# Altium PCB PCB_USB-PD_Power.pcbdoc
Units mil, origin at the board's own origin, x right, y up, seen from the top; angles counter-clockwise.
Board outline 5605 x 4580 mil, 2 copper layers (Top Layer, Bottom Layer); 90 components, 34 nets, 233 pads, 105 vias.
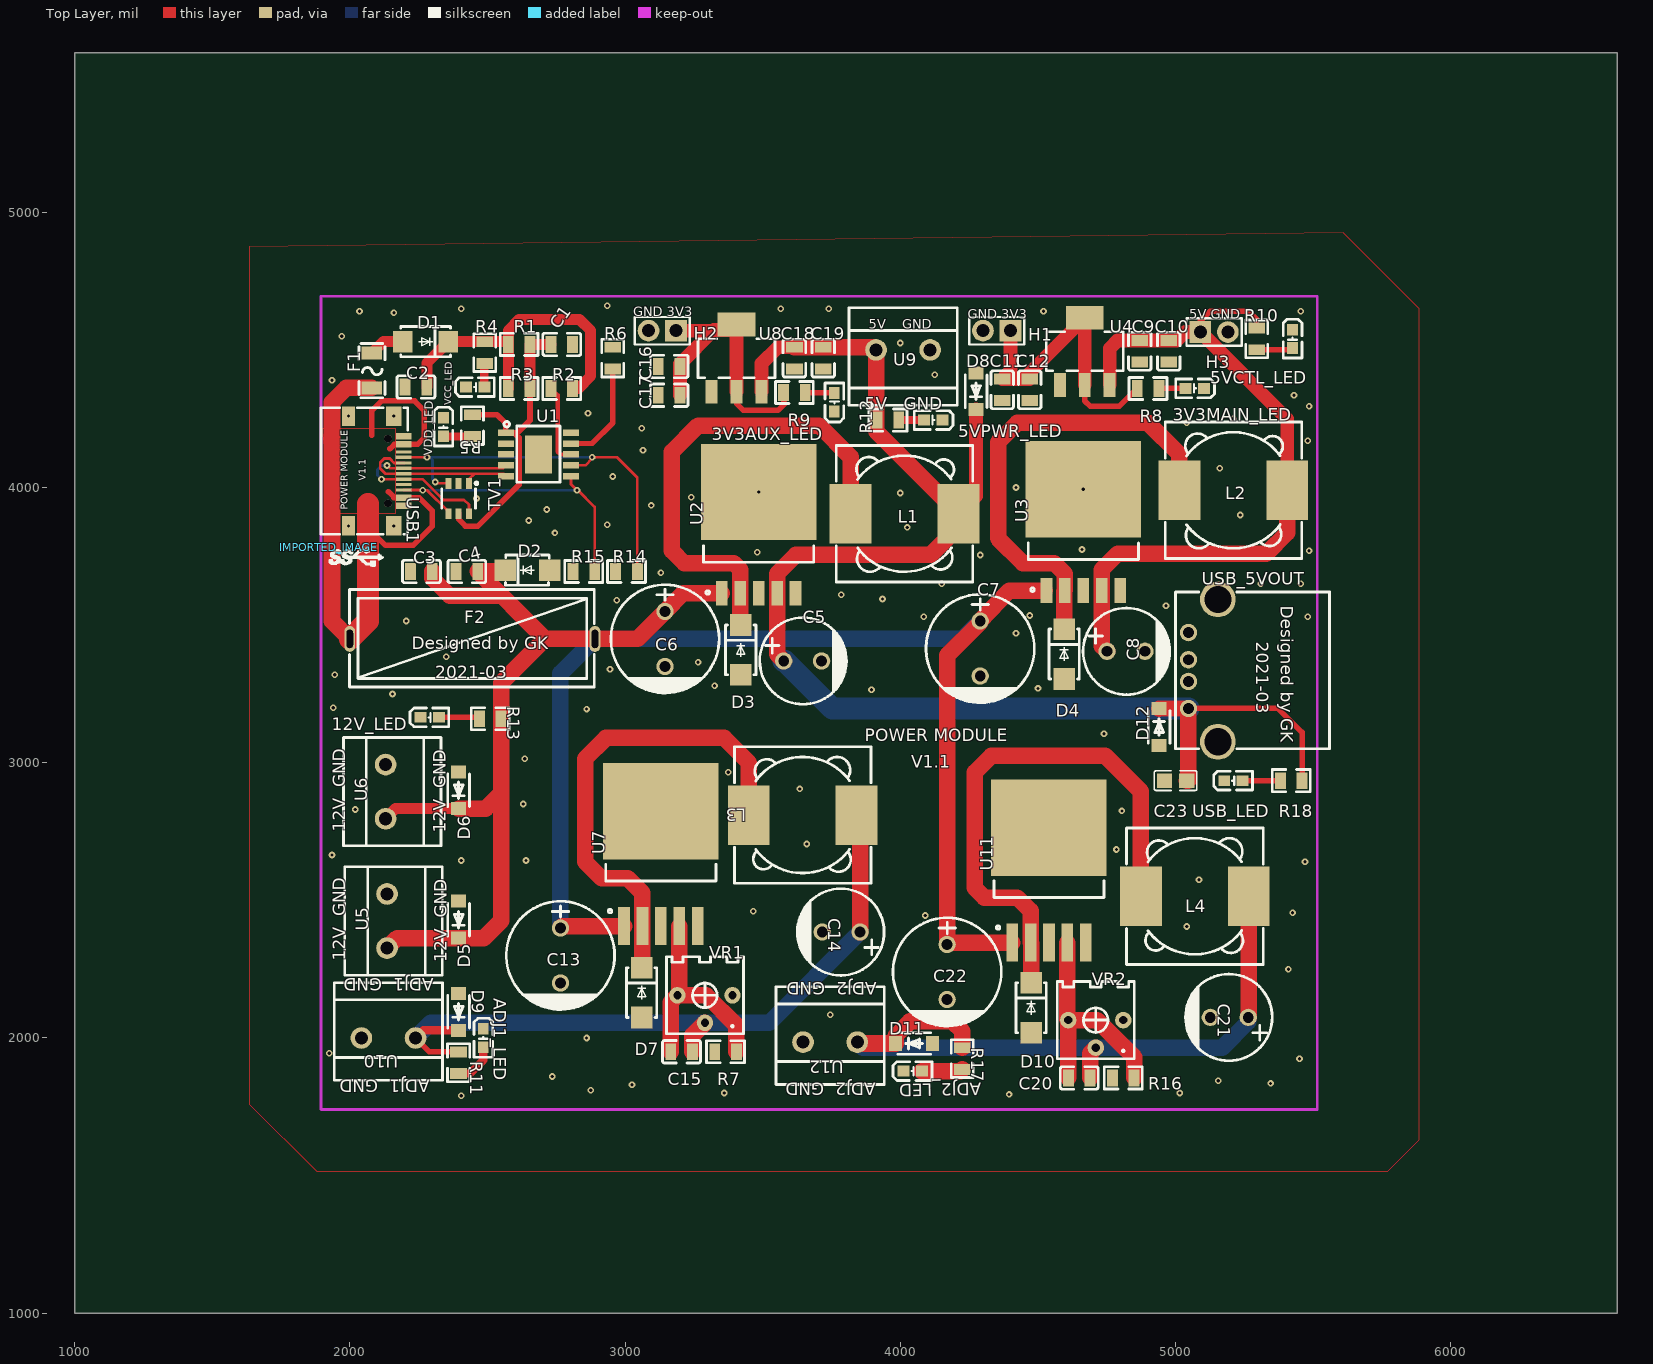
[diagram p0: Top Layer view]
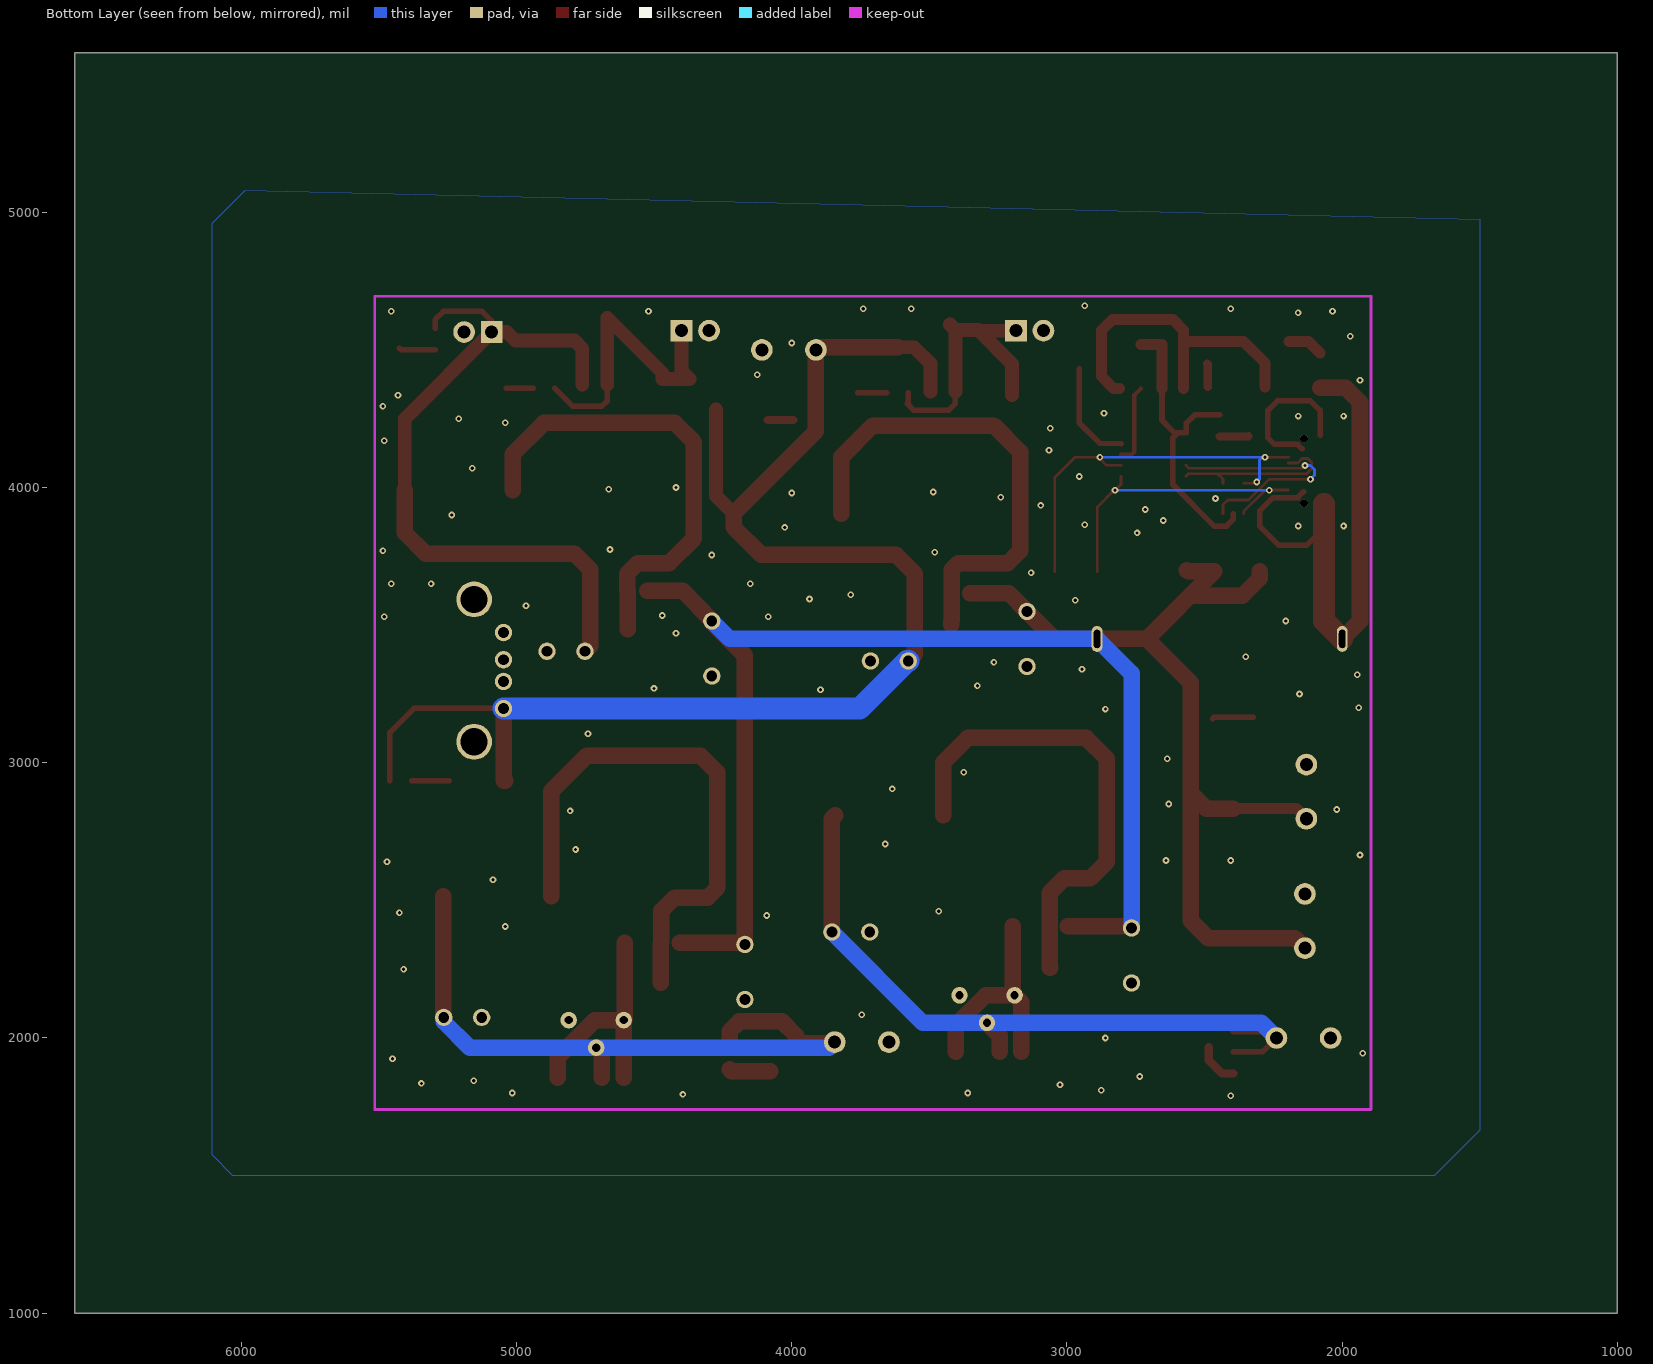
[diagram p1: Bottom Layer view, seen from below]

## Layer stack, top to bottom
Top Layer: signal copper (thickness not stored)
Dielectric: dielectric 12.6, FR-4, Dk 4.8
Bottom Layer: signal copper (thickness not stored)

## Board outline
6605,1000 1000,1000 1000,5580 6605,5580

## Components (designator, comment, footprint, x,y, rotation, side; value= is the part's Value field where it differs from the comment)
3V3AUX_LED "19-217/BHC-ZL1M2RY/3T" LED0603-R-RD 3760,4310 r90 top
3V3MAIN_LED "19-217/BHC-ZL1M2RY/3T" LED0603-R-RD 5070,4360 r180 top
5VCTL_LED "19-217/BHC-ZL1M2RY/3T" LED0603-R-RD 5425,4540 r270 top
5VPWR_LED "19-217/BHC-ZL1M2RY/3T" LED0603-R-RD 4120,4245 r180 top
12V_LED "19-217/BHC-ZL1M2RY/3T" LED0603-R-RD 2290,3165 r0 top
ADJ1_LED "19-217/BHC-ZL1M2RY/3T" LED0603-R-RD 2485,2000 r270 top
ADJ2_LED "19-217/BHC-ZL1M2RY/3T" LED0603-R-RD 4045,1880 r0 top
C1 "1uF" C0805#1 2770,4520 r0 top
C2 "10uF" C0805#1 2240,4365 r0 top
C3 "10uF" C0805#1 2260,3695 r0 top
C4 "10uF" C0805#1 2425,3695 r0 top
C5 "220uF" CAP-TH_BD8.0-P3.50-D1.0-FD 3645,3370 r0 top
C6 "680uF" CAP-TH_BD10.0-P5.00-D1.0-FD 3145,3450 r270 top
C7 "680uF" CAP-TH_BD10.0-P5.00-D1.0-FD 4290,3415 r270 top
C8 "220uF" CAP-TH_BD8.0-P3.50-D1.0-FD 4820,3405 r0 top
C9 "10uF" C0805#1 4870,4495 r90 top
C10 "100nF" C0805#1 4975,4495 r90 top
C11 "10uF" C0805#1 4370,4355 r90 top
C12 "100nF" C0805#1 4470,4355 r90 top
C13 "100uF" CAP-TH_BD10.0-P5.00-D1.0-FD 2765,2300 r270 top
C14 "220uF" CAP-TH_BD8.0-P3.50-D1.0-FD 3785,2385 r180 top
C15 "10nF" C0805#1 3205,1950 r0 top
C16 "100nF" C0805#1 3160,4440 r0 top
C17 "10uF" C0805#1 3160,4335 r0 top
C18 "100nF" C0805#1 3615,4470 r90 top
C19 "10uF" C0805#1 3720,4470 r90 top
C20 "10nF" C0805#1 4650,1855 r0 top
C21 "220uF" CAP-TH_BD8.0-P3.50-D1.0-FD 5195,2075 r180 top
C22 "100uF" CAP-TH_BD10.0-P5.00-D1.0-FD 4170,2240 r270 top
C23 "10uF" C0805#2 5000,2935 r180 top
D1 "SS14" SMA_L4.4-W2.8-LS5.4-RD 2275,4530 r180 top
D2 "SMAJ26A" SMA_L4.3-W2.6-LS5.2-RD 2645,3700 r0 top
D3 "SS34_C8678" DO-214AC_L4.3-W2.7-LS5.3-RD 3420,3410 r270 top
D4 "SS34_C8678" DO-214AC_L4.3-W2.7-LS5.3-RD 4595,3395 r270 top
D5 "SM4007PL" SOD-123F_L2.8-W1.8-LS3.7-RD 2395,2430 r90 top
D6 "SM4007PL" SOD-123F_L2.8-W1.8-LS3.7-RD 2395,2900 r90 top
D7 "SS34_C8678" DO-214AC_L4.3-W2.7-LS5.3-RD 3060,2165 r270 top
D8 "SM4007PL" SOD-123F_L2.8-W1.8-LS3.7-RD 4275,4350 r90 top
D9 "SM4007PL" SOD-123F_L2.8-W1.8-LS3.7-RD 2395,2095 r90 top
D10 "SS34_C8678" DO-214AC_L4.3-W2.7-LS5.3-RD 4475,2110 r270 top
D11 "SM4007PL" SOD-123F_L2.8-W1.8-LS3.7-RD 4050,1980 r0 top
D12 "SM4007PL" SOD-123F_L2.8-W1.8-LS3.7-RD 4940,3130 r270 top
F1 "SMD1206P020TF" F1206 2080,4425 r90 top
F2 "Fuse transparent seat" FUSE-TH_L22.6-W9.0 2445,3450 r0 top
H1 "X6511WV-02H-C30D60" HDR-TH_2P-P2.54-V-M 4350,4570 r180 top
H2 "X6511WV-02H-C30D60" HDR-TH_2P-P2.54-V-M 3135,4570 r180 top
H3 "X6511WV-02H-C30D60" HDR-TH_2P-P2.54-V-M 5140,4565 r0 top
IMPORTED_IMAGE "IMPORTED_IMAGE" IMPORTED_IMAGE 1922.96,3782.38 r0 top
L1 "33uH" IND-SMD_L12.5-W12.5 4015,3905 r0 top
L2 "33uH" IND-SMD_L12.5-W12.5 5210,3990 r0 top
L3 "33uH" IND-SMD_L12.5-W12.5 3645,2810 r180 top
L4 "33uH" IND-SMD_L12.5-W12.5 5070,2515 r180 top
R1 "2K" R0805 2615,4520 r0 top
R2 "10K" R0805 2770,4360 r0 top
R3 "2K" R0805 2615,4360 r0 top
R4 "10K" R0805 2490,4490 r90 top
R5 "10K" R0805 2445,4225 r90 top
R6 "24K" R0805 2955,4470 r90 top
R7 "1K" R0805 3365,1950 r0 top
R8 "1K" R0805 4900,4360 r180 top
R9 "1K" R0805 3615,4345 r180 top
R10 "1K" R0805 5295,4540 r90 top
R11 "10K" R0805 2395,1910 r90 top
R12 "1K" R0805 3955,4245 r180 top
R13 "10K" R0805 2510,3160 r0 top
R14 "5.1K" R0805 3005,3695 r0 top
R15 "5.1K" R0805 2850,3695 r0 top
R16 "1K" R0805 4810,1855 r0 top
R17 "10K" R0805 4225,1925 r90 top
R18 "1K" R0805 5420,2935 r180 top
TV1 "SRV05-4-P-T7" SOT-23-6_L2.9-W1.6-P0.95-LS2.8-BR 2395,3960 r90 top
U1 "CH224K" ESSOP10-EP 2685,4120 r0 top
U2 "LM2596SX-5.0/NOPB" TO-263-5_L10.2-W9.9-P1.70-LS14.4-TL 3485,3800 r90 top
U3 "LM2596SX-5.0/NOPB" TO-263-5_L10.2-W9.9-P1.70-LS14.4-TL 4665,3810 r90 top
U4 "AMS1117-3.3" SOT-223-3_L6.5-W3.4-P2.30-LS7.0-BR 4670,4495 r270 top
U5 "XY126V-5.0-2P" CONN-TH_XY126V-5.0-2P 2135,2425 r90 top
U6 "XY126V-5.0-2P" CONN-TH_XY126V-5.0-2P 2130,2895 r90 top
U7 "LM2596DSADJG" TO-263-5_L10.6-W9.6-P1.70-LS15.9-TL 3130,2615 r90 top
U8 "AMS1117-3.3" SOT-223-3_L6.5-W3.4-P2.30-LS7.0-BR 3405,4470 r270 top
U9 "XY126V-5.0-2P" CONN-TH_XY126V-5.0-2P 4010,4500 r0 top
U10 "XY126V-5.0-2P" CONN-TH_XY126V-5.0-2P 2140,2000 r180 top
U11 "LM2596DSADJG" TO-263-5_L10.6-W9.6-P1.70-LS15.9-TL 4540,2555 r90 top
U12 "XY126V-5.0-2P" CONN-TH_XY126V-5.0-2P 3745,1985 r180 top
USB1 "TYPEC-304S-ACP16" USB-C-SMD_TYPEC-304S-ACP16 2095,4060 r270 top
USB_5VOUT "USB-231-ARY" USB-A-TH_USB-231-ARY 5100,3335 r90 top
USB_LED "19-217/BHC-ZL1M2RY/3T" LED0603-R-RD 5210,2935 r0 top
VCC_LED "19-217/BHC-ZL1M2RY/3T" LED0603-R-RD 2455,4365 r0 top
VDD_LED "19-217/BHC-ZL1M2RY/3T" LED0603-R-RD 2340,4220 r270 top
VR1 "10K" RES-ADJ-TH_3362P 3290,2105 r180 top
VR2 "10K" RES-ADJ-TH_3362P 4710,2015 r180 top

## Footprints (in the part's own frame and the unit in brackets; to place one, negate y for a bottom-side part, rotate by r counter-clockwise, add the part's x,y. Pads: shape width x height; smd on the part's side, far side on the other; paste and mask are expansions set on the pad)
C0805#1 [mm]
  rect 1x1.55 smd: 1(-1,0) 2(1,0)
  silkscreen extent -1.75,-1.04 1.75,1.04
C0805#2 [mm]
  rect 1.41x1.35 smd: 1(-1.03,0) 2(1.03,0)
  silkscreen extent -1.96,-0.9 1.96,0.9
CAP-TH_BD8.0-P3.50-D1.0-FD [mm]
  round 1.6 hole 1: 1(-1.75,0) 2(1.75,0)
  silkscreen extent -3.96,-4 4.04,4
CAP-TH_BD10.0-P5.00-D1.0-FD [mm]
  round 1.6 hole 1: 1(-2.54,0) 2(2.54,0)
  silkscreen extent -5,-4.99 5.08,5
CONN-TH_XY126V-5.0-2P [mm]
  round 2 hole 1.2: 1(-2.5,0) 2(2.5,0)
  silkscreen extent -5,-5.1 5,3.9
DO-214AC_L4.3-W2.7-LS5.3-RD [mm]
  rect 2x2 smd: 1(-2.3,0) 2(2.3,0)
  silkscreen extent -2.3,-1.4 2.3,1.4
ESSOP10-EP [mm]
  rect 2.5x3.5 smd: 0(0,0)
  rect 1.5x0.6 smd: 1(-3,2) 2(-3,1) 3(-3,0) 4(-3,-1) 5(-3,-2) 6(3,-2) 7(3,-1) 8(3,0) 9(3,1) 10(3,2)
  silkscreen extent -3.17,-2.57 2,3.05
F1206 [mm]
  rect 1.2x1.9 smd: 1(-1.6,0) 2(1.6,0)
  silkscreen extent -2.5,-1.2 2.5,1.2
FUSE-TH_L22.6-W9.0 [mm]
  oval 1x2.4 hole 0.6 slot 1.68 at 90 deg: 1(-11.313,0) 2(11.313,0)
  silkscreen extent -11.34,-4.45 11.26,4.55
HDR-TH_2P-P2.54-V-M [mm]
  rect 2x2 hole 1.2: 1(-1.27,0)
  round 2 hole 1.2: 2(1.27,0)
  silkscreen extent -2.54,-1.27 2.54,1.27
IMPORTED_IMAGE [mil]
  silkscreen extent 0,-70 200,0
IND-SMD_L12.5-W12.5 [mm]
  rect 3.85x5.5 smd: 1(-4.975,0) 2(4.975,0)
  silkscreen extent -6.3,-6.3 6.3,6.3
LED0603-R-RD [mil]
  rect 43x39 smd: 1(33.5,0) 2(-33.5,0)
  silkscreen extent -72,-34 70,34
R0805 [mm]
  rect 1x1.55 smd: 1(-1,0) 2(1,0)
  silkscreen extent -1.75,-1.02 1.75,1.02
RES-ADJ-TH_3362P [mil]
  round 60 hole 30: 1(-100,-50) 2(0,50) 3(100,-50)
  silkscreen extent -140,-190 140,90
SMA_L4.3-W2.6-LS5.2-RD [mm]
  rect 2x2 smd: 1(-2.057,0) 2(2.057,0)
  silkscreen extent -2.03,-1.4 2.01,1.4
SMA_L4.4-W2.8-LS5.4-RD [mm]
  rect 1.8x2 smd: 1(-2.1,0) 2(2.1,0)
  silkscreen extent -2.3,-1.4 2.3,1.4
SOD-123F_L2.8-W1.8-LS3.7-RD [mm]
  rect 1.2x1.4 smd: 1(-1.7,0) 2(1.7,0)
  silkscreen extent -1.5,-1 1.5,1
SOT-23-6_L2.9-W1.6-P0.95-LS2.8-BR [mm]
  rect 1x0.55 smd: 1(1.4,-0.95) 2(1.4,0) 3(1.4,0.95) 4(-1.4,0.95) 5(-1.4,0) 6(-1.4,-0.95)
  silkscreen extent -0.9,-1.78 1.52,1.55
SOT-223-3_L6.5-W3.4-P2.30-LS7.0-BR [mm]
  rect 2.2x1.1 smd: 1(3.099,-2.3) 2(3.099,0) 3(3.099,2.3)
  rect 2.2x3.5 smd: 4(-3.099,0)
  silkscreen extent -1.8,-3.55 1.8,3.55
TO-263-5_L10.2-W9.9-P1.70-LS14.4-TL [mil]
  rect 90x42.1 smd: 1(-183.77,134) 2(-183.77,67) 3(-183.77,0) 4(-183.77,-67) 5(-183.77,-134)
  rect 350x419.68 smd: 6(183.77,0)
  silkscreen extent -188,-200 -11,200
TO-263-5_L10.6-W9.6-P1.70-LS15.9-TL [mm]
  rect 3.5x1.069 smd: 1(-5.3,3.404) 2(-5.3,1.702) 3(-5.3,0) 4(-5.3,-1.702) 5(-5.3,-3.404)
  rect 8.89x10.66 smd: 6(5.3,0)
  silkscreen extent -4.07,-5.08 0.41,5.08
USB-A-TH_USB-231-ARY [mm]
  round 1.6 hole 1: 1(-3.5,1.355) 2(-1,1.355) 3(1,1.355) 4(3.5,1.355)
  round 3.3 hole 2.5: 5(-6.57,-1.355) 6(6.57,-1.355)
  silkscreen extent -7.23,-11.68 7.24,2.54
USB-C-SMD_TYPEC-304S-ACP16 [mm]
  rect 1.8x1.45 smd: 13(-5.07,1.632) 14(5.07,1.632)
  rect 1.8x1.2 smd: 15(-5.07,-2.548) 16(5.07,-2.548)
  rect 0.6x1.45 smd: A1B12(-3.225,2.547) A4B9(-2.45,2.547) B1A12(3.22,2.547) B4A9(2.45,2.547)
  rect 0.3x1.45 smd: A5(-1.26,2.532) A6(-0.25,2.547) A7(0.25,2.547) A8(1.25,2.547) B5(1.75,2.547) B6(0.75,2.547) B7(-0.75,2.547) B8(-1.75,2.547)
  round 0.7 hole 0.7 unplated: ""(-2.98,1.103) ""(2.98,1.103)
  silkscreen extent -5.84,-5.08 5.84,2.92

## Via types
v1: diameter 24, hole 12, Top Layer to Bottom Layer, tented both sides, 105 vias

## Nets (pads, with @x,y where several pads share a name; then routed paths per layer and width w, separated by ;. In a path a pad name is that pad's centre, name@x,y a point inside that pad or via, vN(x,y) a via of type N, cw(c..) or ccw(c..) an arc to the next point about the centre after c; other vN are vias at no path point)
3.3V_AUX: C16.2 C17.2 H2.1 R9.2 U8.2 U8.4 | length 1041.4
  Top Layer w20: U8.2 3405,4305 3430,4280 3555,4280 3580,4305 3575.63,4309.37 R9.2
  Top Layer w50: H2.1 3320,4570 3322,4572 ; C17.2 3199.4,4449.4 3322,4572 ; U8.2 U8.4@3405,4572 ; U8.4@3425,4592 U8.4@3405,4572 ; 3322,4572 U8.4@3405,4572
3.3V_MAIN: C11.2 C12.2 H1.1 R8.2 U4.2 U4.4 | length 1121.1
  Top Layer w20: U4.2 4670,4315 4690,4295 4795,4295 R8.2
  Top Layer w50: H1.1 4400,4424.37 C11.2 C12.2 ; C12.2 4470,4417 U4.4 U4.2
5CTL_LED_1: 5VCTL_LED.1 R10.1 | length 132.4
  Top Layer w20: R10.1 5419.13,4500.63 5VCTL_LED.1
5PWR_LED_1: 5VPWR_LED.1 R12.1 | length 92.1
  Top Layer w30: R12.1 5VPWR_LED.1
5V_CTL: C8.1 C9.2 C10.2 H3.1 L2.2 R10.2 U3.4 U4.3 | length 2683.4
  Top Layer w20: H3.1 5090,4605 5125,4640 5265,4640 5295,4610 R10.2
  Top Layer w50: U4.3 4760.55,4505.55 4789.38,4534.37 C9.2 C10.2 ; C10.2 5004.4,4534.4 5035,4565 H3.1 5405.87,4249.13 L2.2
  Top Layer w60: C8.1 4732,3424.1 U3.4 4732,3702 4790,3760 5330,3760 5405.87,3835.87 L2.2
5V_PWR: C5.1 C18.2 C19.2 C23.1 D8.1 D12.1 L1.2 R12.2 R18.1 U2.4 U8.3 U9.1 USB_5VOUT.1 | length 5316.8
  Top Layer w20: USB_5VOUT.1 5372.8,3197.2 5459.37,3110.63 R18.1
  Top Layer w50: U8.3 3495.55,4450.55 3554.37,4509.37 C18.2 ; L1.2 4275,3969.13 D8.1
  Top Layer w60: U2.4 3552,3687 3620,3755 4110,3755 4210.9,3855.9 L1.2 ; U2.4 3552,3394.1 C5.1 ; C18.2 C19.2 3902.21,4509.37 U9.1 3911.6,4204.27 L1.2 ; D12.1 USB_5VOUT.1 ; C23.1 5046.65,2935 USB_5VOUT.1
  Bottom Layer w80: C5.1 3580,3370 3752.8,3197.2 USB_5VOUT.1
12V: C3.2 C4.2 C6.1 C7.1 C13.1 C22.1 D2.1 D5.1 D6.1 F2.2 R13.2 U2.1 U3.1 U5.1 U6.1 U7.1 U11.1 | length 7973.7
  Top Layer w40: U6.1 2166.49,2833.07 D6.1
  Top Layer w60: U5.1 2171.5,2363.07 D5.1 ; C3.2 2299.37,3670.63 2362.92,3607.08 2552.29,3607.08 ; D5.1 2486.9,2363.1 2549.4,2425.5 2549.4,2889.4 ; D6.1 2493.07,2833.07 2549.37,2889.37 R13.2 2549.37,3290 2709.37,3450 ; D2.1 2559,3695 C4.2 2709.37,3450 ; C13.1 2771.35,2406.34 U7.1 ; U2.1 3211.23,3616.23 C6.1 3045,3450 F2.2 2709.37,3450 ; U11.1 4176.34,2346.34 C22.1 4170,3390 4290,3510 C7.1 4395.2,3625 U3.1@4525,3625
  Bottom Layer w60: C13.1 2765,3324.6 2790.12,3349.72 F2.2 4225,3450 C7.1
ADJ1: C14.1 C15.2 D9.1 L3.1 R11.2 U10.1 VR1.2 | length 2675
  Top Layer w20: U10.1 2289.06,1949.37 R11.2
  Top Layer w30: U10.1 2266.5,2028.07 D9.1
  Top Layer w60: C15.2 3244.37,2009.37 VR1.2 ; L3.1 3853.9,2796.96 C14.1
  Bottom Layer w60: U10.1 2293.43,2055 VR1.2 3523.9,2055 C14.1
ADJ1_LED_1: ADJ1_LED.1 R11.1 | length 157
  Top Layer w30: R11.1 2435.6,1870.6 2485,1920 ADJ1_LED.1
ADJ2: C20.2 C21.1 D11.1 L4.1 R17.2 U12.1 VR2.2 | length 2551.5
  Top Layer w60: U12.1 3848.43,1980 D11.1 3983.07,2008.07 4035,2060 4190,2060 4225,2025 R17.2 ; C20.2 4689.37,1944.37 VR2.2 ; C21.1 5265.86,2076.97 L4.1
  Bottom Layer w60: U12.1 3863.43,1965 VR2.2 5170,1965 5263.9,2058.9 C21.1
C20_1: C20.1 R16.2 U11.4 VR2.3 | length 863.3
  Top Layer w60: U11.4 4607,2068 VR2.3 ; C20.1 VR2.3 ; R16.2 4849.4,1930.6 4715,2065 VR2.3
CC1: R14.2 TV1.3 U1.7 USB1.A5 | length 1471.2
  Top Layer w10: USB1.A5 2279.6,4109.6 v1(2280,4110) ; v1(2310,4020) 2314.88,4015.12 TV1.3 ; U1.7 2855.63,4080.63 2880,4105 v1(2880,4110) 2970,4110 3044.37,4035.63 R14.2
  Bottom Layer w10: v1(2310,4020) 2300,4030 2300,4100 2290,4110 v1(2280,4110) v1(2880,4110)
CC2: R15.2 TV1.4 U1.6 USB1.B5 | length 1146.7
  Top Layer w10: USB1.B5 2263.9,3991.1 v1(2265,3990) 2280,3990 2357.6,3912.4 TV1.4 ; U1.6 2803.1,4011.9 v1(2825,3990) 2828.8,3990 2889.4,3929.4 R15.2
  Bottom Layer w10: v1(2265,3990) v1(2825,3990)
D1_2: D1.2 F1.2 | length 129.7
  Top Layer w40: F1.2 2122,4530 D1.2
D4_1: D4.1 L2.1 U3.2 | length 1715
  Top Layer w60: D4.1 4595,3623.23 U3.2 ; U3.2 4598,3687 4560,3725 4445,3725 4355,3815 4355,4165 4425,4235 4900,4235 5014.1,4120.9 L2.1
DM: TV1.1 U1.5 USB1.A7 USB1.B7 | length 629.9
  Top Layer w10: USB1.A7 2558.01,4050.15 U1.5 ; USB1.A7 2129.8,4050.2 2110,4070 2110,4090 2125,4105 2145,4105 2160.5,4089.5 USB1.B7 ; TV1.1 2432.4,4030.4 2452.15,4050.15
DP: TV1.6 U1.4 USB1.A6 USB1.B6 | length 911.8
  Top Layer w10: v1(2115,4030) 2194.82,4030 USB1.B6 2264.53,4030.47 2340,3955 2385,3955 2415,3955 2432.4,3937.6 TV1.6 ; v1(2135,4080) 2145.15,4069.85 USB1.A6 2556.11,4069.84 U1.4
  Bottom Layer w10: v1(2115,4030) 2100,4045 2100,4065 2115,4080 v1(2135,4080)
GND: 3V3AUX_LED.2 3V3MAIN_LED.2 5VCTL_LED.2 5VPWR_LED.2 12V_LED.2 ADJ1_LED.2 ADJ2_LED.2 C1.2 C2.1 C3.1 C4.1 C5.2 C6.2 C7.2 C8.2 C9.1 C10.1 C11.1 C12.1 C13.2 C14.2 C16.1 C17.1 C18.1 C19.1 C21.2 C22.2 C23.2 D2.2 D3.2 D4.2 D5.2 D6.2 D7.2 D8.2 D9.2 D10.2 D11.2 D12.2 H1.2 H2.2 H3.2 R6.2 R7.1 R14.1 R15.1 R16.1 TV1.2 U1.0 U2.3 U2.5 U2.6 U3.3 U3.5 U3.6 U4.1 U5.2 U6.2 U7.3 U7.5 U8.1 U9.2 U10.2 U11.3 U11.5 U12.2 USB1.13 USB1.14 USB1.15 USB1.16 USB1.A1B12 USB1.B1A12 USB_5VOUT.4 USB_5VOUT.5 USB_5VOUT.6 USB_LED.2 VCC_LED.2 VDD_LED.2
  other v1: 2405,1790 4395,1795 3360,1800 5015,1800 2875,1810 3025,1830 5345,1835 5155,1845 2735,1860 5450,1925 1925,1945 2860,2000 3745,2085 5410,2250 5040,2405 4090,2445 5425,2455 3465,2460 5085,2575 5470,2640 2405,2645 2640,2645 1935,2665 4785,2685 3660,2705 4805,2825 2020,2830 2630,2850 3635,2905 3375,2965 2635,3015 4740,3105 2860,3195 1940,3200 2155,3250 3895,3265 4500,3270 3325,3280 1945,3320 2945,3340 3265,3365 2350,3385 4420,3470 2205,3515 4085,3530 5480,3530 4470,3535 4965,3570 2970,3590 3935,3595 3785,3610 4150,3650 5310,3650 5455,3650 3130,3690 4290,3755 3480,3765 5485,3770 4660,3775 2745,3835 4025,3855 1994.71,3860.39 2159.28,3860.39 2935,3865 2650,3880 5235,3900 2715,3920 3095,3935 2460,3960 3240,3965 4000,3980 3485,3983.77 4665,3993.77 4420,4000 2955,4040 5160,4070 3065,4135 5480,4170 3060,4215 5040,4235 5210,4250 1994.71,4259.6 2159.28,4259.6 2865,4270 5485,4295 5430,4335 1935,4390 4125,4410 4000,4525 1970,4550 2160,4635 2035,4640 4520,4640 5455,4640 2405,4650 3565,4650 3740,4650 2935,4660
L4_2: D10.1 L4.2 U11.2 | length 1983
  Top Layer w60: U11.2 4473,2462 4425,2510 4305,2510 4270,2545 4270,2965 4330,3025 4745,3025 4874.1,2895.9 L4.2 ; U11.2 4475,2344.34 D10.1
R4_1: R4.1 VCC_LED.1 | length 86.3
  Top Layer w30: VCC_LED.1 2488.5,4449.13 R4.1
R5_1: R5.1 VDD_LED.1 | length 105
  Top Layer w30: VDD_LED.1 R5.1
R8_1: 3V3MAIN_LED.1 R8.1 | length 97.1
  Top Layer w20: R8.1 3V3MAIN_LED.1
R9_1: 3V3AUX_LED.1 R9.1 | length 106.3
  Top Layer w20: R9.1 3655.87,4343.5 3V3AUX_LED.1
R13_1: 12V_LED.1 R13.1 | length 149.2
  Top Layer w20: 12V_LED.1 2465.63,3165 R13.1
R17_1: ADJ2_LED.1 R17.1 | length 148.8
  Top Layer w60: ADJ2_LED.1 4219.37,1880 R17.1
R18_2: R18.2 USB_LED.1 | length 137.1
  Top Layer w20: USB_LED.1 R18.2
U1_8: R2.1 U1.8 | length 292.3
  Top Layer w15: R2.1 2755,4335.6 2755,4130 2765,4120 U1.8
U1_9: R6.1 U1.9 | length 378.6
  Top Layer w20: U1.9 2880,4160 2955,4235 R6.1
U2_2: D3.1 L1.1 U2.2 | length 1780.1
  Top Layer w60: U2.2 3418,3702 3395,3725 3215,3725 3170,3770 3170,4130 3265,4225 3705,4225 3819.1,4110.9 L1.1 ; U2.2 3418,3517 3420,3515 D3.1
U7_2: D7.1 L3.2 U7.2 | length 1757.3
  Top Layer w60: D7.1@3060,2255.55 3063,2255.55 U7.2 ; U7.2 3063,2527 3010,2580 2915,2580 2855,2640 2855,3015 2930,3090 3360,3090 3449.1,3000.9 L3.2
U7_4: C15.1 R7.2 U7.4 VR1.3 | length 824.6
  Top Layer w60: C15.1 3165.63,2130.63 VR1.3 ; U7.4 3197,2162 VR1.3 ; R7.2 3404.37,2045.63 3295,2155 VR1.3
VCC: C2.2 D1.1 R1.1 R2.2 R3.1 R4.2 | length 1211.7
  Top Layer w40: C2.2 2279.37,4451.69 D1.1 2565.63,4530 R1.1 R3.1 ; R1.1 2575.6,4570.6 2615,4610 2835,4610 2875,4570 2875,4405 2830,4360 R2.2
VDD: C1.1 R1.2 R3.2 R5.2 TV1.5 U1.1 | length 1165.4
  Top Layer w20: TV1.5 2395,3885 2420,3860 2465,3860 2615,4010 2615,4180 2596.3,4198.7 U1.1 ; R5.2 2534.4,4264.4 2566.9,4233.1 U1.1 ; R3.2 2654.4,4244.4 2608.7,4198.7 U1.1
  Top Layer w40: R3.2 R1.2 C1.1
VIN: F1.1 F2.1 USB1.A4B9 USB1.B4A9 | length 2733.8
  Top Layer w20: 2060,3930 2060,3860 2130,3790 2230,3790 2300,3860 2300,3915 2251.5,3963.5 USB1.B4A9 ; 2080,4190 2080,4280 2115,4315 2235,4315 2270,4280 2270,4180 2246.5,4156.5 USB1.A4B9 2161.5,4156.5 2145,4140 ; 2140,3985 2160,3965 2160,3963.55 USB1.B4A9
  Top Layer w60: F2.1 1935,3514.6 1935,4310 1987.01,4362.01 F1.1
  Top Layer w80: F2.1 2065,3515.4 2065,3940
pads on no net: U1.2 U1.3 U1.10 U7.6 U11.6 USB1. USB1.A8 USB1.B8 USB_5VOUT.2 USB_5VOUT.3 VR1.1 VR2.1

## Polygon pours and split planes (outlines as drawn)
GND on Bottom Layer (solid): 1500,4975 1500,1665 1665,1500 6030,1500 6105,1575 6105,4960 5985,5080
VIN on Top Layer (solid): 1900,4215 2165,4215 2165,3905 1940,3905 1935,3910 1935,3970
GND on Top Layer (solid): 1635,4875 1635,1760 1880,1515 5770,1515 5885,1630 5885,4650 5610,4925

## Silkscreen, mask and mechanical layers (free items; w line width, h text height)
Top Overlay:
  text "GND 3V3" at 3030,4622.5 h35
  text "GND 3V3" at 4245,4612.5 h35
  text "5V GND" at 5050,4612.5 h35
  text "5V    GND" at 3885,4577.5 h35
  text "5V   GND" at 3870,4282.5 h45
  text "V1.1" at 2057.5,4025 h25 r90
  text "POWER MODULE" at 1992.5,3920 h25 r90
  text "Designed by GK" at 5382.5,3570 h45 r270
  text "2021-03" at 5292.5,3440 h45 r270
  text "Designed by GK" at 2225,3412.5 h45
  text "2021-03" at 2310,3307.5 h45
  text "POWER MODULE" at 3870,3077.5 h45
  text "V1.1" at 4040,2982.5 h45
  text "12V  GND" at 1982.5,2750 h45 r90
  text "12V  GND" at 2347.5,2745 h45 r90
  text "12V  GND" at 1982.5,2280 h45 r90
  text "12V  GND" at 2352.5,2275 h45 r90
  text "ADJ1  GND" at 2305,2217.5 h45 r180
  text "ADJ2  GND" at 3915,2202.5 h45 r180
  text "ADJ1  GND" at 2290,1847.5 h45 r180
  text "ADJ2  GND" at 3910,1837.5 h45 r180
Document:
  lines w0.1: 3802.49,3289.99 3802.51,3290.01